# EAGLE board 13898-Qwiic_Accelerometer-MMA8452Q-panel.v10 (EAGLE 7.5.0), part 1 of 4
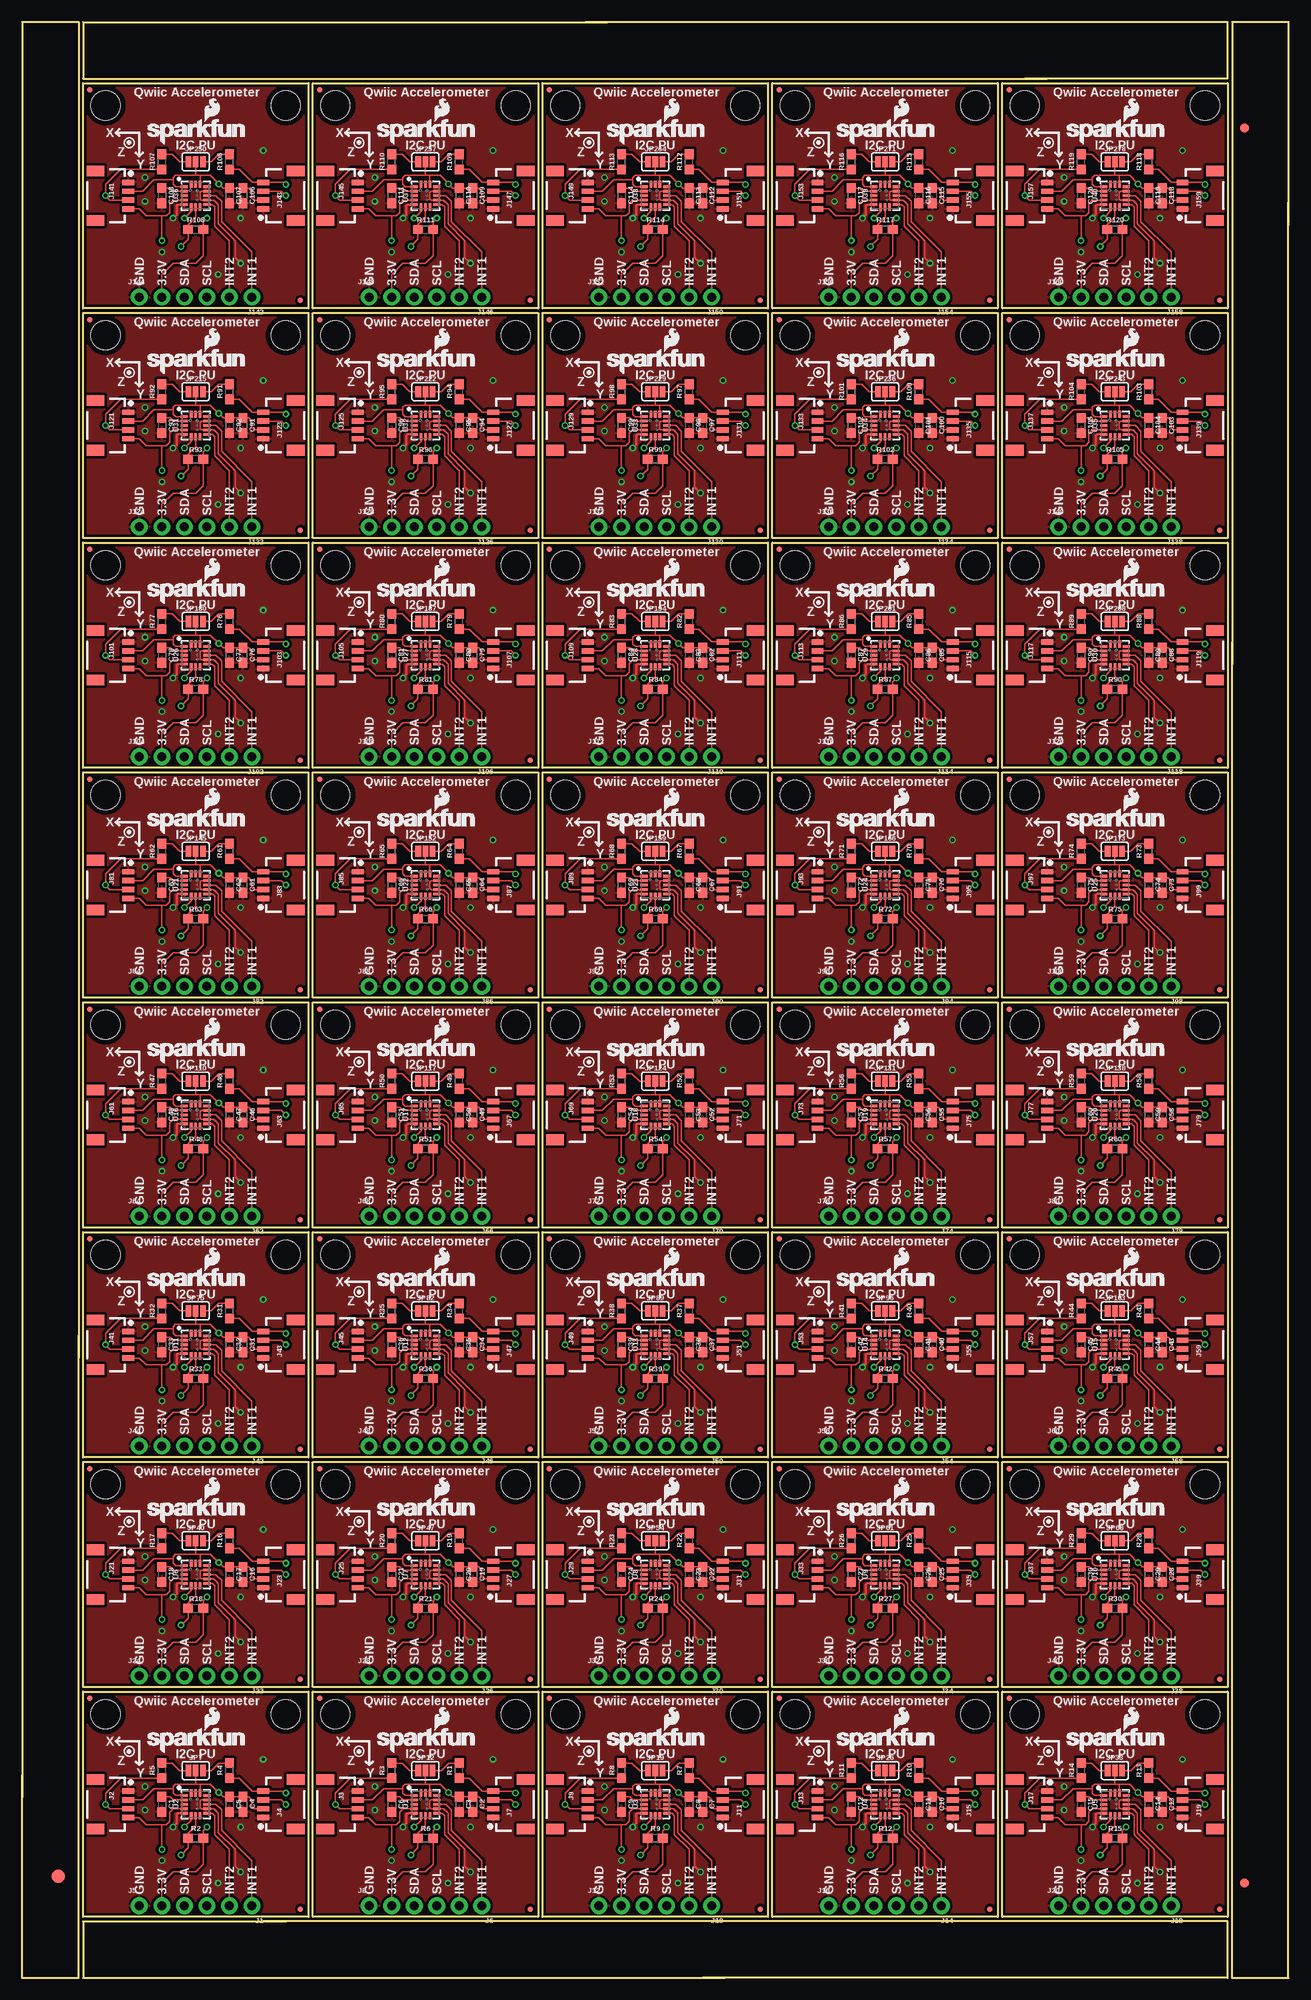
[diagram p0: board, top side]
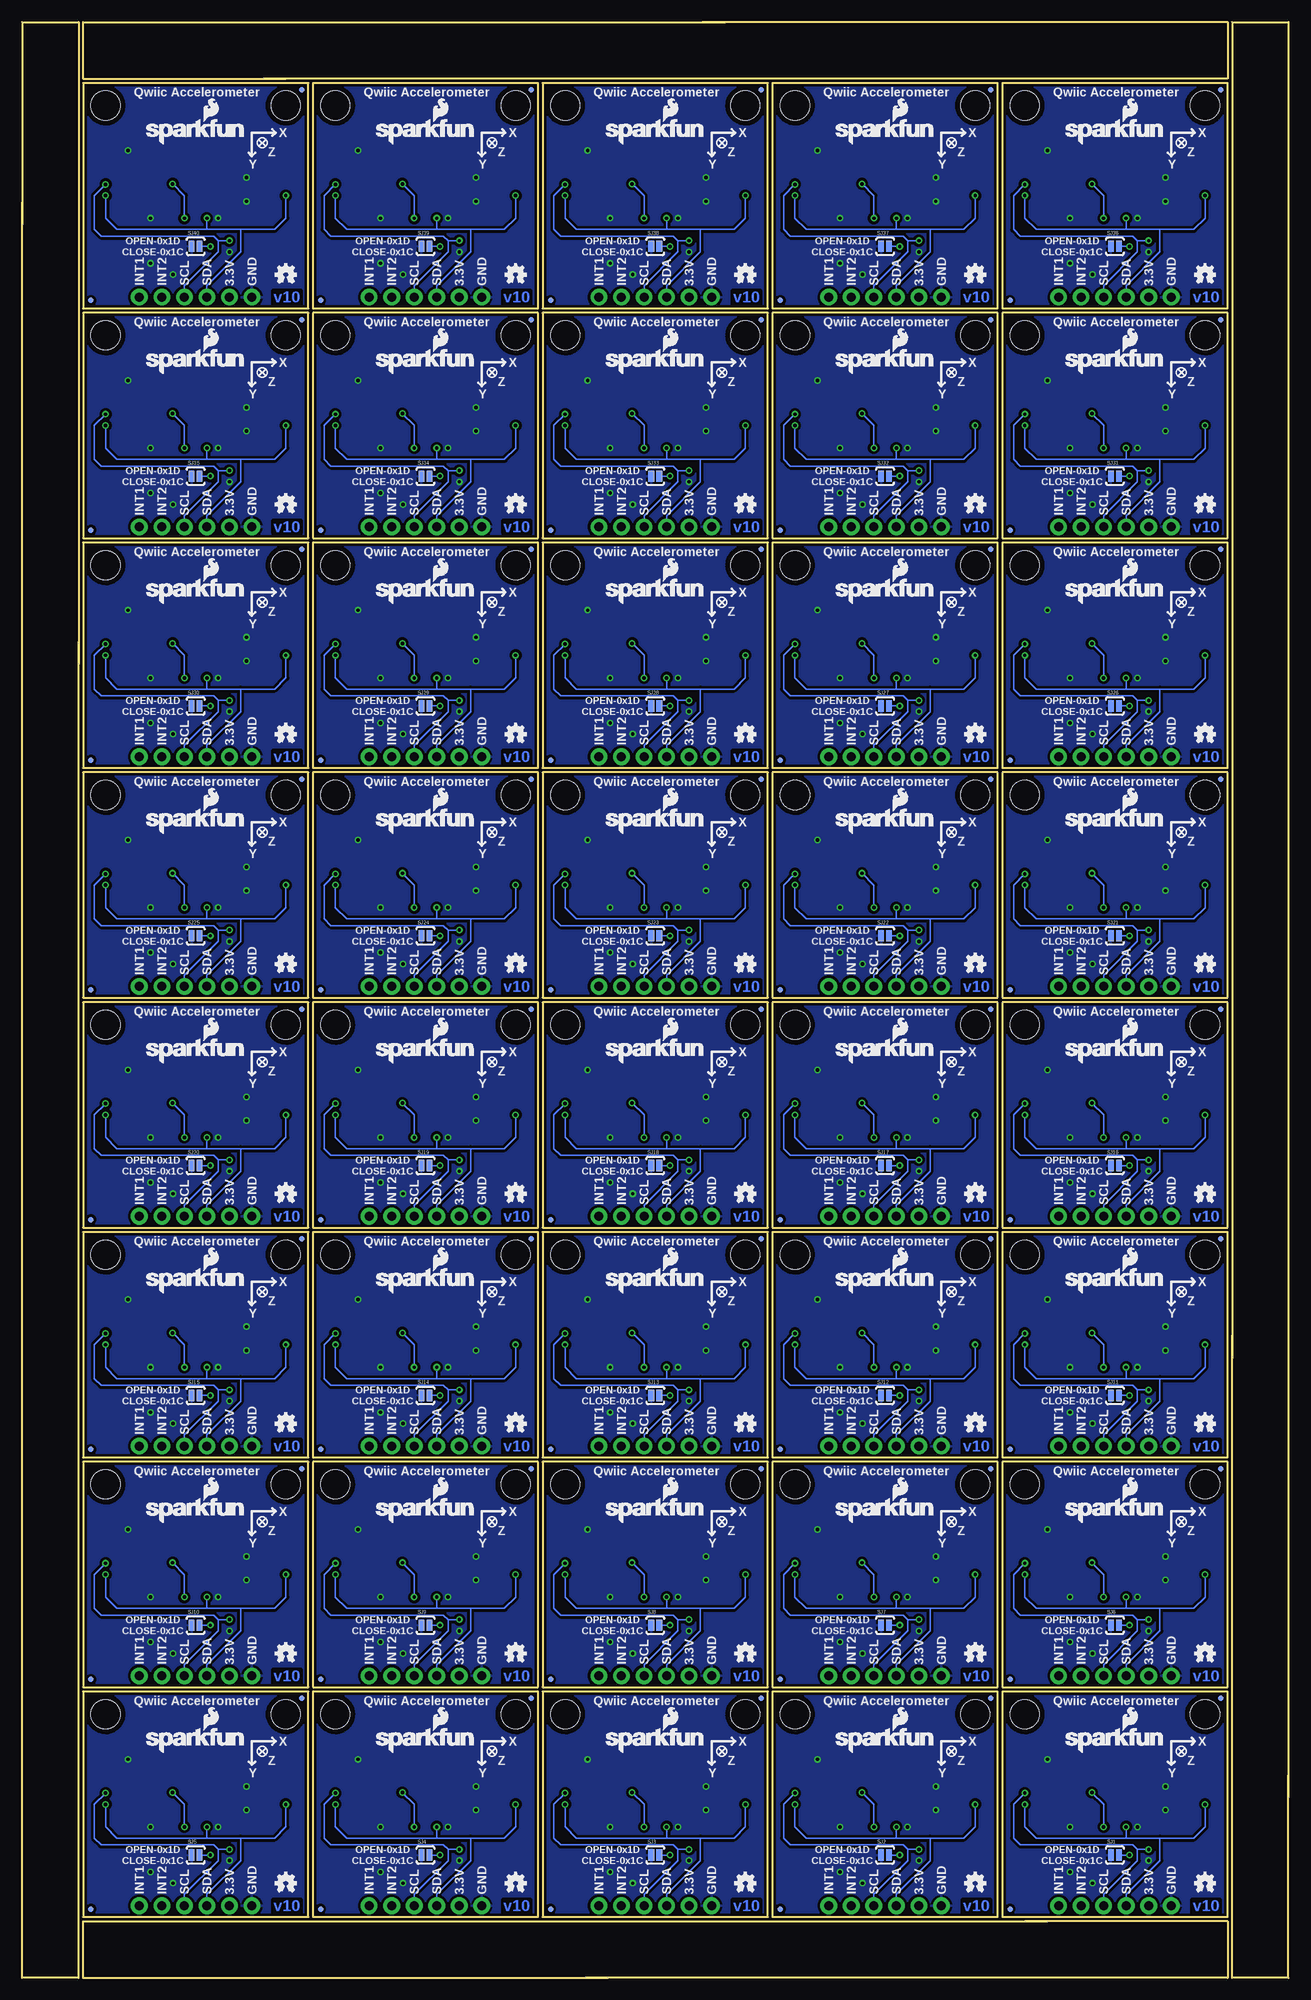
[diagram p1: board, bottom side, seen from below]

Size 142.75 x 220.47 mm. Coordinates in mm from the lower left corner, seen from the top.
Outline: 184 segments
Copper layers (1*16): Top 0.035mm / dielectric 1.5mm / Bottom 0.035mm
Design rules "SparkFun-2-layer-TIGHT": minimum track width 7mil, minimum drill 15mil, track to track 7mil, track to pad 7mil, pad to pad 7mil, via to via 7mil, smd to smd 7mil, copper to edge 7mil, drill to drill 7mil, minimum pad ring 7mil, minimum via ring 7mil, stop-mask expansion 4mil, vias tented up to drill 25mil, thermal gap 10mil

## Footprints (pad centres in the part's own frame; a part is rotated, then mirrored left to right if it is on the bottom)
0603 = smd 1.1 x 1: 1 -0.85,0; 2 0.85,0
FIDUCIAL-1.5X3 = smd 1.5 x 1.5: 1 0,0
FIDUCIAL-1X2 = smd 1 x 1: 1 0,0
1X02_NO_SILK = drill 1.016 pad 1.88: 1 0,0; 2 2.54,0
1X04_1MM_RA = smd 0.6 x 1.35: 1 -1.5,0; 2 -0.5,0; 3 0.5,0; 4 1.5,0 | smd 1.2 x 2: NC1 2.8,-3.675; NC2 -2.8,-3.675
1X04_NO_SILK = drill 1.016 pad 1.88: 1 0,0; 2 2.54,0; 3 5.08,0; 4 7.62,0
MICRO-FIDUCIAL = smd 0.635 x 0.635: 1 0,0
STAND-OFF = hole 3.302: 0,0
SMT-JUMPER_3_2-NC_PASTE_SILK = smd 0.635 x 1.27: 1 -0.813,0; 2 0,0; 3 0.813,0
SJ_2S-NO = smd 0.635 x 1.27: 1 -0.45,0; 2 0.45,0
QFN-16 = smd 0.8 x 0.3: 1 -1.275,1; 2 -1.275,0.5; 3 -1.275,0; 4 -1.275,-0.5; 5 -1.275,-1; 9 1.275,-1; 10 1.275,-0.5; 11 1.275,0; 12 1.275,0.5; 13 1.275,1 | smd 0.3 x 0.8: 6 -0.5,-1.275; 7 0,-1.275; 8 0.5,-1.275; 14 0.5,1.275; 15 0,1.275; 16 -0.5,1.275

## Placement (x,y rotation side)
C1  0.1uF  [0603]  15.75,19.56 270 top
C2  0.1uF  [0603]  50.8,19.56 270 top
C3  4.7uF  [0603]  49.28,19.56 270 top
C4  0.1uF  [0603]  24.89,19.56 270 top
C5  4.7uF  [0603]  23.37,19.56 270 top
C6  0.1uF  [0603]  41.66,19.56 270 top
C7  0.1uF  [0603]  76.71,19.56 270 top
C8  4.7uF  [0603]  75.18,19.56 270 top
C9  0.1uF  [0603]  67.56,19.56 270 top
C10  0.1uF  [0603]  102.62,19.56 270 top
C11  4.7uF  [0603]  101.09,19.56 270 top
C12  0.1uF  [0603]  93.47,19.56 270 top
C13  0.1uF  [0603]  128.52,19.56 270 top
C14  4.7uF  [0603]  127,19.56 270 top
C15  0.1uF  [0603]  119.38,19.56 270 top
C16  0.1uF  [0603]  24.89,45.47 270 top
C17  4.7uF  [0603]  23.37,45.47 270 top
C18  0.1uF  [0603]  15.75,45.47 270 top
C19  0.1uF  [0603]  50.8,45.47 270 top
C20  4.7uF  [0603]  49.28,45.47 270 top
C21  0.1uF  [0603]  41.66,45.47 270 top
C22  0.1uF  [0603]  76.71,45.47 270 top
C23  4.7uF  [0603]  75.18,45.47 270 top
C24  0.1uF  [0603]  67.56,45.47 270 top
C25  0.1uF  [0603]  102.62,45.47 270 top
C26  4.7uF  [0603]  101.09,45.47 270 top
C27  0.1uF  [0603]  93.47,45.47 270 top
C28  0.1uF  [0603]  128.52,45.47 270 top
C29  4.7uF  [0603]  127,45.47 270 top
C30  0.1uF  [0603]  119.38,45.47 270 top
C31  0.1uF  [0603]  24.89,71.37 270 top
C32  4.7uF  [0603]  23.37,71.37 270 top
C33  0.1uF  [0603]  15.75,71.37 270 top
C34  0.1uF  [0603]  50.8,71.37 270 top
C35  4.7uF  [0603]  49.28,71.37 270 top
C36  0.1uF  [0603]  41.66,71.37 270 top
C37  0.1uF  [0603]  76.71,71.37 270 top
C38  4.7uF  [0603]  75.18,71.37 270 top
C39  0.1uF  [0603]  67.56,71.37 270 top
C40  0.1uF  [0603]  102.62,71.37 270 top
C41  4.7uF  [0603]  101.09,71.37 270 top
C42  0.1uF  [0603]  93.47,71.37 270 top
C43  0.1uF  [0603]  128.52,71.37 270 top
C44  4.7uF  [0603]  127,71.37 270 top
C45  0.1uF  [0603]  119.38,71.37 270 top
C46  0.1uF  [0603]  24.89,97.28 270 top
C47  4.7uF  [0603]  23.37,97.28 270 top
C48  0.1uF  [0603]  15.75,97.28 270 top
C49  0.1uF  [0603]  50.8,97.28 270 top
C50  4.7uF  [0603]  49.28,97.28 270 top
C51  0.1uF  [0603]  41.66,97.28 270 top
C52  0.1uF  [0603]  76.71,97.28 270 top
C53  4.7uF  [0603]  75.18,97.28 270 top
C54  0.1uF  [0603]  67.56,97.28 270 top
C55  0.1uF  [0603]  102.62,97.28 270 top
C56  4.7uF  [0603]  101.09,97.28 270 top
C57  0.1uF  [0603]  93.47,97.28 270 top
C58  0.1uF  [0603]  128.52,97.28 270 top
C59  4.7uF  [0603]  127,97.28 270 top
C60  0.1uF  [0603]  119.38,97.28 270 top
C61  0.1uF  [0603]  24.89,123.19 270 top
C62  4.7uF  [0603]  23.37,123.19 270 top
C63  0.1uF  [0603]  15.75,123.19 270 top
C64  0.1uF  [0603]  50.8,123.19 270 top
C65  4.7uF  [0603]  49.28,123.19 270 top
C66  0.1uF  [0603]  41.66,123.19 270 top
C67  0.1uF  [0603]  76.71,123.19 270 top
C68  4.7uF  [0603]  75.18,123.19 270 top
C69  0.1uF  [0603]  67.56,123.19 270 top
C70  0.1uF  [0603]  102.62,123.19 270 top
C71  4.7uF  [0603]  101.09,123.19 270 top
C72  0.1uF  [0603]  93.47,123.19 270 top
C73  0.1uF  [0603]  128.52,123.19 270 top
C74  4.7uF  [0603]  127,123.19 270 top
C75  0.1uF  [0603]  119.38,123.19 270 top
C76  0.1uF  [0603]  24.89,149.1 270 top
C77  4.7uF  [0603]  23.37,149.1 270 top
C78  0.1uF  [0603]  15.75,149.1 270 top
C79  0.1uF  [0603]  50.8,149.1 270 top
C80  4.7uF  [0603]  49.28,149.1 270 top
C81  0.1uF  [0603]  41.66,149.1 270 top
C82  0.1uF  [0603]  76.71,149.1 270 top
C83  4.7uF  [0603]  75.18,149.1 270 top
C84  0.1uF  [0603]  67.56,149.1 270 top
C85  0.1uF  [0603]  102.62,149.1 270 top
C86  4.7uF  [0603]  101.09,149.1 270 top
C87  0.1uF  [0603]  93.47,149.1 270 top
C88  0.1uF  [0603]  128.52,149.1 270 top
C89  4.7uF  [0603]  127,149.1 270 top
C90  0.1uF  [0603]  119.38,149.1 270 top
C91  0.1uF  [0603]  24.89,175.01 270 top
C92  4.7uF  [0603]  23.37,175.01 270 top
C93  0.1uF  [0603]  15.75,175.01 270 top
C94  0.1uF  [0603]  50.8,175.01 270 top
C95  4.7uF  [0603]  49.28,175.01 270 top
C96  0.1uF  [0603]  41.66,175.01 270 top
C97  0.1uF  [0603]  76.71,175.01 270 top
C98  4.7uF  [0603]  75.18,175.01 270 top
C99  0.1uF  [0603]  67.56,175.01 270 top
C100  0.1uF  [0603]  102.62,175.01 270 top
C101  4.7uF  [0603]  101.09,175.01 270 top
C102  0.1uF  [0603]  93.47,175.01 270 top
C103  0.1uF  [0603]  128.52,175.01 270 top
C104  4.7uF  [0603]  127,175.01 270 top
C105  0.1uF  [0603]  119.38,175.01 270 top
C106  0.1uF  [0603]  24.89,200.91 270 top
C107  4.7uF  [0603]  23.37,200.91 270 top
C108  0.1uF  [0603]  15.75,200.91 270 top
C109  0.1uF  [0603]  50.8,200.91 270 top
C110  4.7uF  [0603]  49.28,200.91 270 top
C111  0.1uF  [0603]  41.66,200.91 270 top
C112  0.1uF  [0603]  76.71,200.91 270 top
C113  4.7uF  [0603]  75.18,200.91 270 top
C114  0.1uF  [0603]  67.56,200.91 270 top
C115  0.1uF  [0603]  102.62,200.91 270 top
C116  4.7uF  [0603]  101.09,200.91 270 top
C117  0.1uF  [0603]  93.47,200.91 270 top
C118  0.1uF  [0603]  128.52,200.91 270 top
C119  4.7uF  [0603]  127,200.91 270 top
C120  0.1uF  [0603]  119.38,200.91 270 top
E$1  [FIDUCIAL-1.5X3]  4.06,11.43 0 top
E$7  [FIDUCIAL-1X2]  137.79,208.53 180 top
E$8  [FIDUCIAL-1X2]  137.79,10.67 0 top
J1  [1X02_NO_SILK]  25.91,8.13 180 top
J2  [1X04_1MM_RA]  11.94,19.56 270 top
J3  [1X04_1MM_RA]  37.85,19.56 270 top
J4  [1X04_1MM_RA]  27.18,19.56 90 top
J5  [1X04_NO_SILK]  13.21,8.13 0 top
J6  [1X02_NO_SILK]  51.82,8.13 180 top
J7  [1X04_1MM_RA]  53.09,19.56 90 top
J8  [1X04_NO_SILK]  39.12,8.13 0 top
J9  [1X04_1MM_RA]  63.75,19.56 270 top
J10  [1X02_NO_SILK]  77.72,8.13 180 top
J11  [1X04_1MM_RA]  78.99,19.56 90 top
J12  [1X04_NO_SILK]  65.02,8.13 0 top
J13  [1X04_1MM_RA]  89.66,19.56 270 top
J14  [1X02_NO_SILK]  103.63,8.13 180 top
J15  [1X04_1MM_RA]  104.9,19.56 90 top
J16  [1X04_NO_SILK]  90.93,8.13 0 top
J17  [1X04_1MM_RA]  115.57,19.56 270 top
J18  [1X02_NO_SILK]  129.54,8.13 180 top
J19  [1X04_1MM_RA]  130.81,19.56 90 top
J20  [1X04_NO_SILK]  116.84,8.13 0 top
J21  [1X04_1MM_RA]  11.94,45.47 270 top
J22  [1X02_NO_SILK]  25.91,34.04 180 top
J23  [1X04_1MM_RA]  27.18,45.47 90 top
J24  [1X04_NO_SILK]  13.21,34.04 0 top
J25  [1X04_1MM_RA]  37.85,45.47 270 top
J26  [1X02_NO_SILK]  51.82,34.04 180 top
J27  [1X04_1MM_RA]  53.09,45.47 90 top
J28  [1X04_NO_SILK]  39.12,34.04 0 top
J29  [1X04_1MM_RA]  63.75,45.47 270 top
J30  [1X02_NO_SILK]  77.72,34.04 180 top
J31  [1X04_1MM_RA]  78.99,45.47 90 top
J32  [1X04_NO_SILK]  65.02,34.04 0 top
J33  [1X04_1MM_RA]  89.66,45.47 270 top
J34  [1X02_NO_SILK]  103.63,34.04 180 top
J35  [1X04_1MM_RA]  104.9,45.47 90 top
J36  [1X04_NO_SILK]  90.93,34.04 0 top
J37  [1X04_1MM_RA]  115.57,45.47 270 top
J38  [1X02_NO_SILK]  129.54,34.04 180 top
J39  [1X04_1MM_RA]  130.81,45.47 90 top
J40  [1X04_NO_SILK]  116.84,34.04 0 top
J41  [1X04_1MM_RA]  11.94,71.37 270 top
J42  [1X02_NO_SILK]  25.91,59.94 180 top
J43  [1X04_1MM_RA]  27.18,71.37 90 top
J44  [1X04_NO_SILK]  13.21,59.94 0 top
J45  [1X04_1MM_RA]  37.85,71.37 270 top
J46  [1X02_NO_SILK]  51.82,59.94 180 top
J47  [1X04_1MM_RA]  53.09,71.37 90 top
J48  [1X04_NO_SILK]  39.12,59.94 0 top
J49  [1X04_1MM_RA]  63.75,71.37 270 top
J50  [1X02_NO_SILK]  77.72,59.94 180 top
J51  [1X04_1MM_RA]  78.99,71.37 90 top
J52  [1X04_NO_SILK]  65.02,59.94 0 top
J53  [1X04_1MM_RA]  89.66,71.37 270 top
J54  [1X02_NO_SILK]  103.63,59.94 180 top
J55  [1X04_1MM_RA]  104.9,71.37 90 top
J56  [1X04_NO_SILK]  90.93,59.94 0 top
J57  [1X04_1MM_RA]  115.57,71.37 270 top
J58  [1X02_NO_SILK]  129.54,59.94 180 top
J59  [1X04_1MM_RA]  130.81,71.37 90 top
J60  [1X04_NO_SILK]  116.84,59.94 0 top
J61  [1X04_1MM_RA]  11.94,97.28 270 top
J62  [1X02_NO_SILK]  25.91,85.85 180 top
J63  [1X04_1MM_RA]  27.18,97.28 90 top
J64  [1X04_NO_SILK]  13.21,85.85 0 top
J65  [1X04_1MM_RA]  37.85,97.28 270 top
J66  [1X02_NO_SILK]  51.82,85.85 180 top
J67  [1X04_1MM_RA]  53.09,97.28 90 top
J68  [1X04_NO_SILK]  39.12,85.85 0 top
J69  [1X04_1MM_RA]  63.75,97.28 270 top
J70  [1X02_NO_SILK]  77.72,85.85 180 top
J71  [1X04_1MM_RA]  78.99,97.28 90 top
J72  [1X04_NO_SILK]  65.02,85.85 0 top
J73  [1X04_1MM_RA]  89.66,97.28 270 top
J74  [1X02_NO_SILK]  103.63,85.85 180 top
J75  [1X04_1MM_RA]  104.9,97.28 90 top
J76  [1X04_NO_SILK]  90.93,85.85 0 top
J77  [1X04_1MM_RA]  115.57,97.28 270 top
J78  [1X02_NO_SILK]  129.54,85.85 180 top
J79  [1X04_1MM_RA]  130.81,97.28 90 top
J80  [1X04_NO_SILK]  116.84,85.85 0 top
J81  [1X04_1MM_RA]  11.94,123.19 270 top
J82  [1X02_NO_SILK]  25.91,111.76 180 top
J83  [1X04_1MM_RA]  27.18,123.19 90 top
J84  [1X04_NO_SILK]  13.21,111.76 0 top
J85  [1X04_1MM_RA]  37.85,123.19 270 top
J86  [1X02_NO_SILK]  51.82,111.76 180 top
J87  [1X04_1MM_RA]  53.09,123.19 90 top
J88  [1X04_NO_SILK]  39.12,111.76 0 top
J89  [1X04_1MM_RA]  63.75,123.19 270 top
J90  [1X02_NO_SILK]  77.72,111.76 180 top
J91  [1X04_1MM_RA]  78.99,123.19 90 top
J92  [1X04_NO_SILK]  65.02,111.76 0 top
J93  [1X04_1MM_RA]  89.66,123.19 270 top
J94  [1X02_NO_SILK]  103.63,111.76 180 top
J95  [1X04_1MM_RA]  104.9,123.19 90 top
J96  [1X04_NO_SILK]  90.93,111.76 0 top
J97  [1X04_1MM_RA]  115.57,123.19 270 top
J98  [1X02_NO_SILK]  129.54,111.76 180 top
J99  [1X04_1MM_RA]  130.81,123.19 90 top
J100  [1X04_NO_SILK]  116.84,111.76 0 top
J101  [1X04_1MM_RA]  11.94,149.1 270 top
J102  [1X02_NO_SILK]  25.91,137.67 180 top
J103  [1X04_1MM_RA]  27.18,149.1 90 top
J104  [1X04_NO_SILK]  13.21,137.67 0 top
J105  [1X04_1MM_RA]  37.85,149.1 270 top
J106  [1X02_NO_SILK]  51.82,137.67 180 top
J107  [1X04_1MM_RA]  53.09,149.1 90 top
J108  [1X04_NO_SILK]  39.12,137.67 0 top
J109  [1X04_1MM_RA]  63.75,149.1 270 top
J110  [1X02_NO_SILK]  77.72,137.67 180 top
J111  [1X04_1MM_RA]  78.99,149.1 90 top
J112  [1X04_NO_SILK]  65.02,137.67 0 top
J113  [1X04_1MM_RA]  89.66,149.1 270 top
J114  [1X02_NO_SILK]  103.63,137.67 180 top
J115  [1X04_1MM_RA]  104.9,149.1 90 top
J116  [1X04_NO_SILK]  90.93,137.67 0 top
J117  [1X04_1MM_RA]  115.57,149.1 270 top
J118  [1X02_NO_SILK]  129.54,137.67 180 top
J119  [1X04_1MM_RA]  130.81,149.1 90 top
J120  [1X04_NO_SILK]  116.84,137.67 0 top
J121  [1X04_1MM_RA]  11.94,175.01 270 top
J122  [1X02_NO_SILK]  25.91,163.58 180 top
J123  [1X04_1MM_RA]  27.18,175.01 90 top
J124  [1X04_NO_SILK]  13.21,163.58 0 top
J125  [1X04_1MM_RA]  37.85,175.01 270 top
J126  [1X02_NO_SILK]  51.82,163.58 180 top
J127  [1X04_1MM_RA]  53.09,175.01 90 top
J128  [1X04_NO_SILK]  39.12,163.58 0 top
J129  [1X04_1MM_RA]  63.75,175.01 270 top
J130  [1X02_NO_SILK]  77.72,163.58 180 top
J131  [1X04_1MM_RA]  78.99,175.01 90 top
J132  [1X04_NO_SILK]  65.02,163.58 0 top
J133  [1X04_1MM_RA]  89.66,175.01 270 top
J134  [1X02_NO_SILK]  103.63,163.58 180 top
J135  [1X04_1MM_RA]  104.9,175.01 90 top
J136  [1X04_NO_SILK]  90.93,163.58 0 top
J137  [1X04_1MM_RA]  115.57,175.01 270 top
J138  [1X02_NO_SILK]  129.54,163.58 180 top
J139  [1X04_1MM_RA]  130.81,175.01 90 top
J140  [1X04_NO_SILK]  116.84,163.58 0 top
J141  [1X04_1MM_RA]  11.94,200.91 270 top
J142  [1X02_NO_SILK]  25.91,189.48 180 top
J143  [1X04_1MM_RA]  27.18,200.91 90 top
J144  [1X04_NO_SILK]  13.21,189.48 0 top
J145  [1X04_1MM_RA]  37.85,200.91 270 top
J146  [1X02_NO_SILK]  51.82,189.48 180 top
J147  [1X04_1MM_RA]  53.09,200.91 90 top
J148  [1X04_NO_SILK]  39.12,189.48 0 top
J149  [1X04_1MM_RA]  63.75,200.91 270 top
J150  [1X02_NO_SILK]  77.72,189.48 180 top
J151  [1X04_1MM_RA]  78.99,200.91 90 top
J152  [1X04_NO_SILK]  65.02,189.48 0 top
J153  [1X04_1MM_RA]  89.66,200.91 270 top
J154  [1X02_NO_SILK]  103.63,189.48 180 top
J155  [1X04_1MM_RA]  104.9,200.91 90 top
J156  [1X04_NO_SILK]  90.93,189.48 0 top
J157  [1X04_1MM_RA]  115.57,200.91 270 top
J158  [1X02_NO_SILK]  129.54,189.48 180 top
J159  [1X04_1MM_RA]  130.81,200.91 90 top
J160  [1X04_NO_SILK]  116.84,189.48 0 top
JP1  FIDUCIALUFIDUCIAL  [MICRO-FIDUCIAL]  31.37,7.75 0 bottom
JP2  FIDUCIALUFIDUCIAL  [MICRO-FIDUCIAL]  31.37,7.75 0 top
JP3  STAND-OFF  [STAND-OFF]  9.4,29.72 0 top
JP4  STAND-OFF  [STAND-OFF]  29.72,29.72 0 top
JP5  FIDUCIALUFIDUCIAL  [MICRO-FIDUCIAL]  7.62,31.5 0 bottom
JP6  FIDUCIALUFIDUCIAL  [MICRO-FIDUCIAL]  7.62,31.5 0 top
JP7  [SMT-JUMPER_3_2-NC_PASTE_SILK]  19.56,23.37 0 top
JP8  STAND-OFF  [STAND-OFF]  35.31,29.72 0 top
JP9  STAND-OFF  [STAND-OFF]  55.63,29.72 0 top
JP10  FIDUCIALUFIDUCIAL  [MICRO-FIDUCIAL]  57.28,7.75 0 top
JP11  FIDUCIALUFIDUCIAL  [MICRO-FIDUCIAL]  33.53,31.5 0 top
JP12  [SMT-JUMPER_3_2-NC_PASTE_SILK]  45.47,23.37 0 top
JP13  FIDUCIALUFIDUCIAL  [MICRO-FIDUCIAL]  57.28,7.75 0 bottom
JP14  FIDUCIALUFIDUCIAL  [MICRO-FIDUCIAL]  33.53,31.5 0 bottom
JP15  STAND-OFF  [STAND-OFF]  61.21,29.72 0 top
JP16  STAND-OFF  [STAND-OFF]  81.53,29.72 0 top
JP17  FIDUCIALUFIDUCIAL  [MICRO-FIDUCIAL]  83.19,7.75 0 top
JP18  FIDUCIALUFIDUCIAL  [MICRO-FIDUCIAL]  59.44,31.5 0 top
JP19  [SMT-JUMPER_3_2-NC_PASTE_SILK]  71.37,23.37 0 top
JP20  FIDUCIALUFIDUCIAL  [MICRO-FIDUCIAL]  83.19,7.75 0 bottom
JP21  FIDUCIALUFIDUCIAL  [MICRO-FIDUCIAL]  59.44,31.5 0 bottom
JP22  STAND-OFF  [STAND-OFF]  87.12,29.72 0 top
JP23  STAND-OFF  [STAND-OFF]  107.44,29.72 0 top
JP24  FIDUCIALUFIDUCIAL  [MICRO-FIDUCIAL]  109.09,7.75 0 top
JP25  FIDUCIALUFIDUCIAL  [MICRO-FIDUCIAL]  85.34,31.5 0 top
JP26  [SMT-JUMPER_3_2-NC_PASTE_SILK]  97.28,23.37 0 top
JP27  FIDUCIALUFIDUCIAL  [MICRO-FIDUCIAL]  109.09,7.75 0 bottom
JP28  FIDUCIALUFIDUCIAL  [MICRO-FIDUCIAL]  85.34,31.5 0 bottom
JP29  STAND-OFF  [STAND-OFF]  113.03,29.72 0 top
JP30  STAND-OFF  [STAND-OFF]  133.35,29.72 0 top
JP31  FIDUCIALUFIDUCIAL  [MICRO-FIDUCIAL]  135,7.75 0 top
JP32  FIDUCIALUFIDUCIAL  [MICRO-FIDUCIAL]  111.25,31.5 0 top
JP33  [SMT-JUMPER_3_2-NC_PASTE_SILK]  123.19,23.37 0 top
JP34  FIDUCIALUFIDUCIAL  [MICRO-FIDUCIAL]  135,7.75 0 bottom
JP35  FIDUCIALUFIDUCIAL  [MICRO-FIDUCIAL]  111.25,31.5 0 bottom
JP36  STAND-OFF  [STAND-OFF]  9.4,55.63 0 top
JP37  STAND-OFF  [STAND-OFF]  29.72,55.63 0 top
JP38  FIDUCIALUFIDUCIAL  [MICRO-FIDUCIAL]  31.37,33.66 0 top
JP39  FIDUCIALUFIDUCIAL  [MICRO-FIDUCIAL]  7.62,57.4 0 top
JP40  [SMT-JUMPER_3_2-NC_PASTE_SILK]  19.56,49.28 0 top
JP41  FIDUCIALUFIDUCIAL  [MICRO-FIDUCIAL]  31.37,33.66 0 bottom
JP42  FIDUCIALUFIDUCIAL  [MICRO-FIDUCIAL]  7.62,57.4 0 bottom
JP43  STAND-OFF  [STAND-OFF]  35.31,55.63 0 top
JP44  STAND-OFF  [STAND-OFF]  55.63,55.63 0 top
JP45  FIDUCIALUFIDUCIAL  [MICRO-FIDUCIAL]  57.28,33.66 0 top
JP46  FIDUCIALUFIDUCIAL  [MICRO-FIDUCIAL]  33.53,57.4 0 top
JP47  [SMT-JUMPER_3_2-NC_PASTE_SILK]  45.47,49.28 0 top
JP48  FIDUCIALUFIDUCIAL  [MICRO-FIDUCIAL]  57.28,33.66 0 bottom
JP49  FIDUCIALUFIDUCIAL  [MICRO-FIDUCIAL]  33.53,57.4 0 bottom
JP50  STAND-OFF  [STAND-OFF]  61.21,55.63 0 top
JP51  STAND-OFF  [STAND-OFF]  81.53,55.63 0 top
JP52  FIDUCIALUFIDUCIAL  [MICRO-FIDUCIAL]  83.19,33.66 0 top
JP53  FIDUCIALUFIDUCIAL  [MICRO-FIDUCIAL]  59.44,57.4 0 top
JP54  [SMT-JUMPER_3_2-NC_PASTE_SILK]  71.37,49.28 0 top
JP55  FIDUCIALUFIDUCIAL  [MICRO-FIDUCIAL]  83.19,33.66 0 bottom
JP56  FIDUCIALUFIDUCIAL  [MICRO-FIDUCIAL]  59.44,57.4 0 bottom
JP57  STAND-OFF  [STAND-OFF]  87.12,55.63 0 top
JP58  STAND-OFF  [STAND-OFF]  107.44,55.63 0 top
JP59  FIDUCIALUFIDUCIAL  [MICRO-FIDUCIAL]  109.09,33.66 0 top
JP60  FIDUCIALUFIDUCIAL  [MICRO-FIDUCIAL]  85.34,57.4 0 top
JP61  [SMT-JUMPER_3_2-NC_PASTE_SILK]  97.28,49.28 0 top
JP62  FIDUCIALUFIDUCIAL  [MICRO-FIDUCIAL]  109.09,33.66 0 bottom
JP63  FIDUCIALUFIDUCIAL  [MICRO-FIDUCIAL]  85.34,57.4 0 bottom
JP64  STAND-OFF  [STAND-OFF]  113.03,55.63 0 top
JP65  STAND-OFF  [STAND-OFF]  133.35,55.63 0 top
JP66  FIDUCIALUFIDUCIAL  [MICRO-FIDUCIAL]  135,33.66 0 top
JP67  FIDUCIALUFIDUCIAL  [MICRO-FIDUCIAL]  111.25,57.4 0 top
JP68  [SMT-JUMPER_3_2-NC_PASTE_SILK]  123.19,49.28 0 top
JP69  FIDUCIALUFIDUCIAL  [MICRO-FIDUCIAL]  135,33.66 0 bottom
JP70  FIDUCIALUFIDUCIAL  [MICRO-FIDUCIAL]  111.25,57.4 0 bottom
JP71  STAND-OFF  [STAND-OFF]  9.4,81.53 0 top
JP72  STAND-OFF  [STAND-OFF]  29.72,81.53 0 top
JP73  FIDUCIALUFIDUCIAL  [MICRO-FIDUCIAL]  31.37,59.56 0 top
JP74  FIDUCIALUFIDUCIAL  [MICRO-FIDUCIAL]  7.62,83.31 0 top
JP75  [SMT-JUMPER_3_2-NC_PASTE_SILK]  19.56,75.18 0 top
JP76  FIDUCIALUFIDUCIAL  [MICRO-FIDUCIAL]  31.37,59.56 0 bottom
JP77  FIDUCIALUFIDUCIAL  [MICRO-FIDUCIAL]  7.62,83.31 0 bottom
JP78  STAND-OFF  [STAND-OFF]  35.31,81.53 0 top
JP79  STAND-OFF  [STAND-OFF]  55.63,81.53 0 top
JP80  FIDUCIALUFIDUCIAL  [MICRO-FIDUCIAL]  57.28,59.56 0 top
JP81  FIDUCIALUFIDUCIAL  [MICRO-FIDUCIAL]  33.53,83.31 0 top
JP82  [SMT-JUMPER_3_2-NC_PASTE_SILK]  45.47,75.18 0 top
JP83  FIDUCIALUFIDUCIAL  [MICRO-FIDUCIAL]  57.28,59.56 0 bottom
JP84  FIDUCIALUFIDUCIAL  [MICRO-FIDUCIAL]  33.53,83.31 0 bottom
JP85  STAND-OFF  [STAND-OFF]  61.21,81.53 0 top
JP86  STAND-OFF  [STAND-OFF]  81.53,81.53 0 top
JP87  FIDUCIALUFIDUCIAL  [MICRO-FIDUCIAL]  83.19,59.56 0 top
JP88  FIDUCIALUFIDUCIAL  [MICRO-FIDUCIAL]  59.44,83.31 0 top
JP89  [SMT-JUMPER_3_2-NC_PASTE_SILK]  71.37,75.18 0 top
JP90  FIDUCIALUFIDUCIAL  [MICRO-FIDUCIAL]  83.19,59.56 0 bottom
JP91  FIDUCIALUFIDUCIAL  [MICRO-FIDUCIAL]  59.44,83.31 0 bottom
JP92  STAND-OFF  [STAND-OFF]  87.12,81.53 0 top
JP93  STAND-OFF  [STAND-OFF]  107.44,81.53 0 top
JP94  FIDUCIALUFIDUCIAL  [MICRO-FIDUCIAL]  109.09,59.56 0 top
JP95  FIDUCIALUFIDUCIAL  [MICRO-FIDUCIAL]  85.34,83.31 0 top
JP96  [SMT-JUMPER_3_2-NC_PASTE_SILK]  97.28,75.18 0 top
JP97  FIDUCIALUFIDUCIAL  [MICRO-FIDUCIAL]  109.09,59.56 0 bottom
JP98  FIDUCIALUFIDUCIAL  [MICRO-FIDUCIAL]  85.34,83.31 0 bottom
JP99  STAND-OFF  [STAND-OFF]  113.03,81.53 0 top
JP100  STAND-OFF  [STAND-OFF]  133.35,81.53 0 top
JP101  FIDUCIALUFIDUCIAL  [MICRO-FIDUCIAL]  135,59.56 0 top
JP102  FIDUCIALUFIDUCIAL  [MICRO-FIDUCIAL]  111.25,83.31 0 top
JP103  [SMT-JUMPER_3_2-NC_PASTE_SILK]  123.19,75.18 0 top
JP104  FIDUCIALUFIDUCIAL  [MICRO-FIDUCIAL]  135,59.56 0 bottom
JP105  FIDUCIALUFIDUCIAL  [MICRO-FIDUCIAL]  111.25,83.31 0 bottom
JP106  STAND-OFF  [STAND-OFF]  9.4,107.44 0 top
JP107  STAND-OFF  [STAND-OFF]  29.72,107.44 0 top
JP108  FIDUCIALUFIDUCIAL  [MICRO-FIDUCIAL]  31.37,85.47 0 top
JP109  FIDUCIALUFIDUCIAL  [MICRO-FIDUCIAL]  7.62,109.22 0 top
JP110  [SMT-JUMPER_3_2-NC_PASTE_SILK]  19.56,101.09 0 top
JP111  FIDUCIALUFIDUCIAL  [MICRO-FIDUCIAL]  31.37,85.47 0 bottom
JP112  FIDUCIALUFIDUCIAL  [MICRO-FIDUCIAL]  7.62,109.22 0 bottom
JP113  STAND-OFF  [STAND-OFF]  35.31,107.44 0 top
JP114  STAND-OFF  [STAND-OFF]  55.63,107.44 0 top
JP115  FIDUCIALUFIDUCIAL  [MICRO-FIDUCIAL]  57.28,85.47 0 top
JP116  FIDUCIALUFIDUCIAL  [MICRO-FIDUCIAL]  33.53,109.22 0 top
JP117  [SMT-JUMPER_3_2-NC_PASTE_SILK]  45.47,101.09 0 top
JP118  FIDUCIALUFIDUCIAL  [MICRO-FIDUCIAL]  57.28,85.47 0 bottom
JP119  FIDUCIALUFIDUCIAL  [MICRO-FIDUCIAL]  33.53,109.22 0 bottom
JP120  STAND-OFF  [STAND-OFF]  61.21,107.44 0 top
JP121  STAND-OFF  [STAND-OFF]  81.53,107.44 0 top
JP122  FIDUCIALUFIDUCIAL  [MICRO-FIDUCIAL]  83.19,85.47 0 top
JP123  FIDUCIALUFIDUCIAL  [MICRO-FIDUCIAL]  59.44,109.22 0 top
JP124  [SMT-JUMPER_3_2-NC_PASTE_SILK]  71.37,101.09 0 top
JP125  FIDUCIALUFIDUCIAL  [MICRO-FIDUCIAL]  83.19,85.47 0 bottom
JP126  FIDUCIALUFIDUCIAL  [MICRO-FIDUCIAL]  59.44,109.22 0 bottom
JP127  STAND-OFF  [STAND-OFF]  87.12,107.44 0 top
JP128  STAND-OFF  [STAND-OFF]  107.44,107.44 0 top
JP129  FIDUCIALUFIDUCIAL  [MICRO-FIDUCIAL]  109.09,85.47 0 top
JP130  FIDUCIALUFIDUCIAL  [MICRO-FIDUCIAL]  85.34,109.22 0 top
JP131  [SMT-JUMPER_3_2-NC_PASTE_SILK]  97.28,101.09 0 top
JP132  FIDUCIALUFIDUCIAL  [MICRO-FIDUCIAL]  109.09,85.47 0 bottom
JP133  FIDUCIALUFIDUCIAL  [MICRO-FIDUCIAL]  85.34,109.22 0 bottom
JP134  STAND-OFF  [STAND-OFF]  113.03,107.44 0 top
JP135  STAND-OFF  [STAND-OFF]  133.35,107.44 0 top
JP136  FIDUCIALUFIDUCIAL  [MICRO-FIDUCIAL]  135,85.47 0 top
JP137  FIDUCIALUFIDUCIAL  [MICRO-FIDUCIAL]  111.25,109.22 0 top
JP138  [SMT-JUMPER_3_2-NC_PASTE_SILK]  123.19,101.09 0 top
JP139  FIDUCIALUFIDUCIAL  [MICRO-FIDUCIAL]  135,85.47 0 bottom
JP140  FIDUCIALUFIDUCIAL  [MICRO-FIDUCIAL]  111.25,109.22 0 bottom
JP141  STAND-OFF  [STAND-OFF]  9.4,133.35 0 top
JP142  STAND-OFF  [STAND-OFF]  29.72,133.35 0 top
JP143  FIDUCIALUFIDUCIAL  [MICRO-FIDUCIAL]  31.37,111.38 0 top
JP144  FIDUCIALUFIDUCIAL  [MICRO-FIDUCIAL]  7.62,135.13 0 top
JP145  [SMT-JUMPER_3_2-NC_PASTE_SILK]  19.56,127 0 top
JP146  FIDUCIALUFIDUCIAL  [MICRO-FIDUCIAL]  31.37,111.38 0 bottom
JP147  FIDUCIALUFIDUCIAL  [MICRO-FIDUCIAL]  7.62,135.13 0 bottom
JP148  STAND-OFF  [STAND-OFF]  35.31,133.35 0 top
JP149  STAND-OFF  [STAND-OFF]  55.63,133.35 0 top
JP150  FIDUCIALUFIDUCIAL  [MICRO-FIDUCIAL]  57.28,111.38 0 top
JP151  FIDUCIALUFIDUCIAL  [MICRO-FIDUCIAL]  33.53,135.13 0 top
JP152  [SMT-JUMPER_3_2-NC_PASTE_SILK]  45.47,127 0 top
JP153  FIDUCIALUFIDUCIAL  [MICRO-FIDUCIAL]  57.28,111.38 0 bottom
JP154  FIDUCIALUFIDUCIAL  [MICRO-FIDUCIAL]  33.53,135.13 0 bottom
JP155  STAND-OFF  [STAND-OFF]  61.21,133.35 0 top
JP156  STAND-OFF  [STAND-OFF]  81.53,133.35 0 top
JP157  FIDUCIALUFIDUCIAL  [MICRO-FIDUCIAL]  83.19,111.38 0 top
JP158  FIDUCIALUFIDUCIAL  [MICRO-FIDUCIAL]  59.44,135.13 0 top
JP159  [SMT-JUMPER_3_2-NC_PASTE_SILK]  71.37,127 0 top
JP160  FIDUCIALUFIDUCIAL  [MICRO-FIDUCIAL]  83.19,111.38 0 bottom
JP161  FIDUCIALUFIDUCIAL  [MICRO-FIDUCIAL]  59.44,135.13 0 bottom
JP162  STAND-OFF  [STAND-OFF]  87.12,133.35 0 top
JP163  STAND-OFF  [STAND-OFF]  107.44,133.35 0 top
JP164  FIDUCIALUFIDUCIAL  [MICRO-FIDUCIAL]  109.09,111.38 0 top
JP165  FIDUCIALUFIDUCIAL  [MICRO-FIDUCIAL]  85.34,135.13 0 top
JP166  [SMT-JUMPER_3_2-NC_PASTE_SILK]  97.28,127 0 top
JP167  FIDUCIALUFIDUCIAL  [MICRO-FIDUCIAL]  109.09,111.38 0 bottom
JP168  FIDUCIALUFIDUCIAL  [MICRO-FIDUCIAL]  85.34,135.13 0 bottom
JP169  STAND-OFF  [STAND-OFF]  113.03,133.35 0 top
JP170  STAND-OFF  [STAND-OFF]  133.35,133.35 0 top
JP171  FIDUCIALUFIDUCIAL  [MICRO-FIDUCIAL]  135,111.38 0 top
JP172  FIDUCIALUFIDUCIAL  [MICRO-FIDUCIAL]  111.25,135.13 0 top
JP173  [SMT-JUMPER_3_2-NC_PASTE_SILK]  123.19,127 0 top
JP174  FIDUCIALUFIDUCIAL  [MICRO-FIDUCIAL]  135,111.38 0 bottom
JP175  FIDUCIALUFIDUCIAL  [MICRO-FIDUCIAL]  111.25,135.13 0 bottom
JP176  STAND-OFF  [STAND-OFF]  9.4,159.26 0 top
JP177  STAND-OFF  [STAND-OFF]  29.72,159.26 0 top
JP178  FIDUCIALUFIDUCIAL  [MICRO-FIDUCIAL]  31.37,137.29 0 top
JP179  FIDUCIALUFIDUCIAL  [MICRO-FIDUCIAL]  7.62,161.04 0 top
JP180  [SMT-JUMPER_3_2-NC_PASTE_SILK]  19.56,152.91 0 top
JP181  FIDUCIALUFIDUCIAL  [MICRO-FIDUCIAL]  31.37,137.29 0 bottom
JP182  FIDUCIALUFIDUCIAL  [MICRO-FIDUCIAL]  7.62,161.04 0 bottom
JP183  STAND-OFF  [STAND-OFF]  35.31,159.26 0 top
JP184  STAND-OFF  [STAND-OFF]  55.63,159.26 0 top
JP185  FIDUCIALUFIDUCIAL  [MICRO-FIDUCIAL]  57.28,137.29 0 top
JP186  FIDUCIALUFIDUCIAL  [MICRO-FIDUCIAL]  33.53,161.04 0 top
JP187  [SMT-JUMPER_3_2-NC_PASTE_SILK]  45.47,152.91 0 top
JP188  FIDUCIALUFIDUCIAL  [MICRO-FIDUCIAL]  57.28,137.29 0 bottom
JP189  FIDUCIALUFIDUCIAL  [MICRO-FIDUCIAL]  33.53,161.04 0 bottom
JP190  STAND-OFF  [STAND-OFF]  61.21,159.26 0 top
JP191  STAND-OFF  [STAND-OFF]  81.53,159.26 0 top
JP192  FIDUCIALUFIDUCIAL  [MICRO-FIDUCIAL]  83.19,137.29 0 top
JP193  FIDUCIALUFIDUCIAL  [MICRO-FIDUCIAL]  59.44,161.04 0 top
JP194  [SMT-JUMPER_3_2-NC_PASTE_SILK]  71.37,152.91 0 top
JP195  FIDUCIALUFIDUCIAL  [MICRO-FIDUCIAL]  83.19,137.29 0 bottom
JP196  FIDUCIALUFIDUCIAL  [MICRO-FIDUCIAL]  59.44,161.04 0 bottom
JP197  STAND-OFF  [STAND-OFF]  87.12,159.26 0 top
JP198  STAND-OFF  [STAND-OFF]  107.44,159.26 0 top
JP199  FIDUCIALUFIDUCIAL  [MICRO-FIDUCIAL]  109.09,137.29 0 top
JP200  FIDUCIALUFIDUCIAL  [MICRO-FIDUCIAL]  85.34,161.04 0 top
JP201  [SMT-JUMPER_3_2-NC_PASTE_SILK]  97.28,152.91 0 top
JP202  FIDUCIALUFIDUCIAL  [MICRO-FIDUCIAL]  109.09,137.29 0 bottom
JP203  FIDUCIALUFIDUCIAL  [MICRO-FIDUCIAL]  85.34,161.04 0 bottom
JP204  STAND-OFF  [STAND-OFF]  113.03,159.26 0 top
JP205  STAND-OFF  [STAND-OFF]  133.35,159.26 0 top
JP206  FIDUCIALUFIDUCIAL  [MICRO-FIDUCIAL]  135,137.29 0 top
JP207  FIDUCIALUFIDUCIAL  [MICRO-FIDUCIAL]  111.25,161.04 0 top
JP208  [SMT-JUMPER_3_2-NC_PASTE_SILK]  123.19,152.91 0 top
JP209  FIDUCIALUFIDUCIAL  [MICRO-FIDUCIAL]  135,137.29 0 bottom
JP210  FIDUCIALUFIDUCIAL  [MICRO-FIDUCIAL]  111.25,161.04 0 bottom
JP211  STAND-OFF  [STAND-OFF]  9.4,185.17 0 top
JP212  STAND-OFF  [STAND-OFF]  29.72,185.17 0 top
JP213  FIDUCIALUFIDUCIAL  [MICRO-FIDUCIAL]  31.37,163.19 0 top
JP214  FIDUCIALUFIDUCIAL  [MICRO-FIDUCIAL]  7.62,186.94 0 top
JP215  [SMT-JUMPER_3_2-NC_PASTE_SILK]  19.56,178.82 0 top
JP216  FIDUCIALUFIDUCIAL  [MICRO-FIDUCIAL]  31.37,163.19 0 bottom
JP217  FIDUCIALUFIDUCIAL  [MICRO-FIDUCIAL]  7.62,186.94 0 bottom
JP218  STAND-OFF  [STAND-OFF]  35.31,185.17 0 top
JP219  STAND-OFF  [STAND-OFF]  55.63,185.17 0 top
JP220  FIDUCIALUFIDUCIAL  [MICRO-FIDUCIAL]  57.28,163.19 0 top
JP221  FIDUCIALUFIDUCIAL  [MICRO-FIDUCIAL]  33.53,186.94 0 top
JP222  [SMT-JUMPER_3_2-NC_PASTE_SILK]  45.47,178.82 0 top
JP223  FIDUCIALUFIDUCIAL  [MICRO-FIDUCIAL]  57.28,163.19 0 bottom
JP224  FIDUCIALUFIDUCIAL  [MICRO-FIDUCIAL]  33.53,186.94 0 bottom
JP225  STAND-OFF  [STAND-OFF]  61.21,185.17 0 top
JP226  STAND-OFF  [STAND-OFF]  81.53,185.17 0 top
JP227  FIDUCIALUFIDUCIAL  [MICRO-FIDUCIAL]  83.19,163.19 0 top
JP228  FIDUCIALUFIDUCIAL  [MICRO-FIDUCIAL]  59.44,186.94 0 top
JP229  [SMT-JUMPER_3_2-NC_PASTE_SILK]  71.37,178.82 0 top
JP230  FIDUCIALUFIDUCIAL  [MICRO-FIDUCIAL]  83.19,163.19 0 bottom
JP231  FIDUCIALUFIDUCIAL  [MICRO-FIDUCIAL]  59.44,186.94 0 bottom
JP232  STAND-OFF  [STAND-OFF]  87.12,185.17 0 top
JP233  STAND-OFF  [STAND-OFF]  107.44,185.17 0 top
JP234  FIDUCIALUFIDUCIAL  [MICRO-FIDUCIAL]  109.09,163.19 0 top
JP235  FIDUCIALUFIDUCIAL  [MICRO-FIDUCIAL]  85.34,186.94 0 top
JP236  [SMT-JUMPER_3_2-NC_PASTE_SILK]  97.28,178.82 0 top
JP237  FIDUCIALUFIDUCIAL  [MICRO-FIDUCIAL]  109.09,163.19 0 bottom
JP238  FIDUCIALUFIDUCIAL  [MICRO-FIDUCIAL]  85.34,186.94 0 bottom
JP239  STAND-OFF  [STAND-OFF]  113.03,185.17 0 top
JP240  STAND-OFF  [STAND-OFF]  133.35,185.17 0 top
JP241  FIDUCIALUFIDUCIAL  [MICRO-FIDUCIAL]  135,163.19 0 top
JP242  FIDUCIALUFIDUCIAL  [MICRO-FIDUCIAL]  111.25,186.94 0 top
JP243  [SMT-JUMPER_3_2-NC_PASTE_SILK]  123.19,178.82 0 top
JP244  FIDUCIALUFIDUCIAL  [MICRO-FIDUCIAL]  135,163.19 0 bottom
JP245  FIDUCIALUFIDUCIAL  [MICRO-FIDUCIAL]  111.25,186.94 0 bottom
JP246  STAND-OFF  [STAND-OFF]  9.4,211.07 0 top
JP247  STAND-OFF  [STAND-OFF]  29.72,211.07 0 top
JP248  FIDUCIALUFIDUCIAL  [MICRO-FIDUCIAL]  31.37,189.1 0 top
JP249  FIDUCIALUFIDUCIAL  [MICRO-FIDUCIAL]  7.62,212.85 0 top
JP250  [SMT-JUMPER_3_2-NC_PASTE_SILK]  19.56,204.72 0 top
JP251  FIDUCIALUFIDUCIAL  [MICRO-FIDUCIAL]  31.37,189.1 0 bottom
JP252  FIDUCIALUFIDUCIAL  [MICRO-FIDUCIAL]  7.62,212.85 0 bottom
JP253  STAND-OFF  [STAND-OFF]  35.31,211.07 0 top
JP254  STAND-OFF  [STAND-OFF]  55.63,211.07 0 top
JP255  FIDUCIALUFIDUCIAL  [MICRO-FIDUCIAL]  57.28,189.1 0 top
JP256  FIDUCIALUFIDUCIAL  [MICRO-FIDUCIAL]  33.53,212.85 0 top
JP257  [SMT-JUMPER_3_2-NC_PASTE_SILK]  45.47,204.72 0 top
JP258  FIDUCIALUFIDUCIAL  [MICRO-FIDUCIAL]  57.28,189.1 0 bottom
JP259  FIDUCIALUFIDUCIAL  [MICRO-FIDUCIAL]  33.53,212.85 0 bottom
JP260  STAND-OFF  [STAND-OFF]  61.21,211.07 0 top
JP261  STAND-OFF  [STAND-OFF]  81.53,211.07 0 top
JP262  FIDUCIALUFIDUCIAL  [MICRO-FIDUCIAL]  83.19,189.1 0 top
JP263  FIDUCIALUFIDUCIAL  [MICRO-FIDUCIAL]  59.44,212.85 0 top
JP264  [SMT-JUMPER_3_2-NC_PASTE_SILK]  71.37,204.72 0 top
JP265  FIDUCIALUFIDUCIAL  [MICRO-FIDUCIAL]  83.19,189.1 0 bottom
JP266  FIDUCIALUFIDUCIAL  [MICRO-FIDUCIAL]  59.44,212.85 0 bottom
JP267  STAND-OFF  [STAND-OFF]  87.12,211.07 0 top
JP268  STAND-OFF  [STAND-OFF]  107.44,211.07 0 top
JP269  FIDUCIALUFIDUCIAL  [MICRO-FIDUCIAL]  109.09,189.1 0 top
JP270  FIDUCIALUFIDUCIAL  [MICRO-FIDUCIAL]  85.34,212.85 0 top
JP271  [SMT-JUMPER_3_2-NC_PASTE_SILK]  97.28,204.72 0 top
JP272  FIDUCIALUFIDUCIAL  [MICRO-FIDUCIAL]  109.09,189.1 0 bottom
JP273  FIDUCIALUFIDUCIAL  [MICRO-FIDUCIAL]  85.34,212.85 0 bottom
JP274  STAND-OFF  [STAND-OFF]  113.03,211.07 0 top
JP275  STAND-OFF  [STAND-OFF]  133.35,211.07 0 top
JP276  FIDUCIALUFIDUCIAL  [MICRO-FIDUCIAL]  135,189.1 0 top
JP277  FIDUCIALUFIDUCIAL  [MICRO-FIDUCIAL]  111.25,212.85 0 top
JP278  [SMT-JUMPER_3_2-NC_PASTE_SILK]  123.19,204.72 0 top
JP279  FIDUCIALUFIDUCIAL  [MICRO-FIDUCIAL]  135,189.1 0 bottom
JP280  FIDUCIALUFIDUCIAL  [MICRO-FIDUCIAL]  111.25,212.85 0 bottom
LOGO1  OSHW-LOGOMINI  [OSHW-LOGO-MINI]  9.4,10.67 0 bottom
LOGO2  SFE_LOGO_NAME_FLAME.1_INCH  [SFE_LOGO_NAME_FLAME_.1]  13.72,25.27 0 top
LOGO3  SFE_LOGO_NAME_FLAME.1_INCH  [SFE_LOGO_NAME_FLAME_.1]  25.53,25.27 0 bottom
LOGO4  OSHW-LOGOMINI  [OSHW-LOGO-MINI]  35.31,10.67 0 bottom
LOGO5  SFE_LOGO_NAME_FLAME.1_INCH  [SFE_LOGO_NAME_FLAME_.1]  39.62,25.27 0 top
LOGO6  SFE_LOGO_NAME_FLAME.1_INCH  [SFE_LOGO_NAME_FLAME_.1]  51.44,25.27 0 bottom
LOGO7  OSHW-LOGOMINI  [OSHW-LOGO-MINI]  61.21,10.67 0 bottom
LOGO8  SFE_LOGO_NAME_FLAME.1_INCH  [SFE_LOGO_NAME_FLAME_.1]  65.53,25.27 0 top
LOGO9  SFE_LOGO_NAME_FLAME.1_INCH  [SFE_LOGO_NAME_FLAME_.1]  77.34,25.27 0 bottom
LOGO10  OSHW-LOGOMINI  [OSHW-LOGO-MINI]  87.12,10.67 0 bottom
LOGO11  SFE_LOGO_NAME_FLAME.1_INCH  [SFE_LOGO_NAME_FLAME_.1]  91.44,25.27 0 top
LOGO12  SFE_LOGO_NAME_FLAME.1_INCH  [SFE_LOGO_NAME_FLAME_.1]  103.25,25.27 0 bottom
LOGO13  OSHW-LOGOMINI  [OSHW-LOGO-MINI]  113.03,10.67 0 bottom
LOGO14  SFE_LOGO_NAME_FLAME.1_INCH  [SFE_LOGO_NAME_FLAME_.1]  117.35,25.27 0 top
LOGO15  SFE_LOGO_NAME_FLAME.1_INCH  [SFE_LOGO_NAME_FLAME_.1]  129.16,25.27 0 bottom
LOGO16  OSHW-LOGOMINI  [OSHW-LOGO-MINI]  9.4,36.58 0 bottom
LOGO17  SFE_LOGO_NAME_FLAME.1_INCH  [SFE_LOGO_NAME_FLAME_.1]  13.72,51.18 0 top
LOGO18  SFE_LOGO_NAME_FLAME.1_INCH  [SFE_LOGO_NAME_FLAME_.1]  25.53,51.18 0 bottom
LOGO19  OSHW-LOGOMINI  [OSHW-LOGO-MINI]  35.31,36.58 0 bottom
LOGO20  SFE_LOGO_NAME_FLAME.1_INCH  [SFE_LOGO_NAME_FLAME_.1]  39.62,51.18 0 top
LOGO21  SFE_LOGO_NAME_FLAME.1_INCH  [SFE_LOGO_NAME_FLAME_.1]  51.44,51.18 0 bottom
LOGO22  OSHW-LOGOMINI  [OSHW-LOGO-MINI]  61.21,36.58 0 bottom
LOGO23  SFE_LOGO_NAME_FLAME.1_INCH  [SFE_LOGO_NAME_FLAME_.1]  65.53,51.18 0 top
LOGO24  SFE_LOGO_NAME_FLAME.1_INCH  [SFE_LOGO_NAME_FLAME_.1]  77.34,51.18 0 bottom
LOGO25  OSHW-LOGOMINI  [OSHW-LOGO-MINI]  87.12,36.58 0 bottom
LOGO26  SFE_LOGO_NAME_FLAME.1_INCH  [SFE_LOGO_NAME_FLAME_.1]  91.44,51.18 0 top
LOGO27  SFE_LOGO_NAME_FLAME.1_INCH  [SFE_LOGO_NAME_FLAME_.1]  103.25,51.18 0 bottom
LOGO28  OSHW-LOGOMINI  [OSHW-LOGO-MINI]  113.03,36.58 0 bottom
LOGO29  SFE_LOGO_NAME_FLAME.1_INCH  [SFE_LOGO_NAME_FLAME_.1]  117.35,51.18 0 top
LOGO30  SFE_LOGO_NAME_FLAME.1_INCH  [SFE_LOGO_NAME_FLAME_.1]  129.16,51.18 0 bottom
LOGO31  OSHW-LOGOMINI  [OSHW-LOGO-MINI]  9.4,62.48 0 bottom
LOGO32  SFE_LOGO_NAME_FLAME.1_INCH  [SFE_LOGO_NAME_FLAME_.1]  13.72,77.09 0 top
LOGO33  SFE_LOGO_NAME_FLAME.1_INCH  [SFE_LOGO_NAME_FLAME_.1]  25.53,77.09 0 bottom
LOGO34  OSHW-LOGOMINI  [OSHW-LOGO-MINI]  35.31,62.48 0 bottom
LOGO35  SFE_LOGO_NAME_FLAME.1_INCH  [SFE_LOGO_NAME_FLAME_.1]  39.62,77.09 0 top
LOGO36  SFE_LOGO_NAME_FLAME.1_INCH  [SFE_LOGO_NAME_FLAME_.1]  51.44,77.09 0 bottom
LOGO37  OSHW-LOGOMINI  [OSHW-LOGO-MINI]  61.21,62.48 0 bottom
LOGO38  SFE_LOGO_NAME_FLAME.1_INCH  [SFE_LOGO_NAME_FLAME_.1]  65.53,77.09 0 top
LOGO39  SFE_LOGO_NAME_FLAME.1_INCH  [SFE_LOGO_NAME_FLAME_.1]  77.34,77.09 0 bottom
LOGO40  OSHW-LOGOMINI  [OSHW-LOGO-MINI]  87.12,62.48 0 bottom
LOGO41  SFE_LOGO_NAME_FLAME.1_INCH  [SFE_LOGO_NAME_FLAME_.1]  91.44,77.09 0 top
LOGO42  SFE_LOGO_NAME_FLAME.1_INCH  [SFE_LOGO_NAME_FLAME_.1]  103.25,77.09 0 bottom
LOGO43  OSHW-LOGOMINI  [OSHW-LOGO-MINI]  113.03,62.48 0 bottom
LOGO44  SFE_LOGO_NAME_FLAME.1_INCH  [SFE_LOGO_NAME_FLAME_.1]  117.35,77.09 0 top
LOGO45  SFE_LOGO_NAME_FLAME.1_INCH  [SFE_LOGO_NAME_FLAME_.1]  129.16,77.09 0 bottom
LOGO46  OSHW-LOGOMINI  [OSHW-LOGO-MINI]  9.4,88.39 0 bottom
LOGO47  SFE_LOGO_NAME_FLAME.1_INCH  [SFE_LOGO_NAME_FLAME_.1]  13.72,103 0 top
LOGO48  SFE_LOGO_NAME_FLAME.1_INCH  [SFE_LOGO_NAME_FLAME_.1]  25.53,103 0 bottom
LOGO49  OSHW-LOGOMINI  [OSHW-LOGO-MINI]  35.31,88.39 0 bottom
LOGO50  SFE_LOGO_NAME_FLAME.1_INCH  [SFE_LOGO_NAME_FLAME_.1]  39.62,103 0 top
LOGO51  SFE_LOGO_NAME_FLAME.1_INCH  [SFE_LOGO_NAME_FLAME_.1]  51.44,103 0 bottom
LOGO52  OSHW-LOGOMINI  [OSHW-LOGO-MINI]  61.21,88.39 0 bottom
LOGO53  SFE_LOGO_NAME_FLAME.1_INCH  [SFE_LOGO_NAME_FLAME_.1]  65.53,103 0 top
LOGO54  SFE_LOGO_NAME_FLAME.1_INCH  [SFE_LOGO_NAME_FLAME_.1]  77.34,103 0 bottom
LOGO55  OSHW-LOGOMINI  [OSHW-LOGO-MINI]  87.12,88.39 0 bottom
LOGO56  SFE_LOGO_NAME_FLAME.1_INCH  [SFE_LOGO_NAME_FLAME_.1]  91.44,103 0 top
LOGO57  SFE_LOGO_NAME_FLAME.1_INCH  [SFE_LOGO_NAME_FLAME_.1]  103.25,103 0 bottom
LOGO58  OSHW-LOGOMINI  [OSHW-LOGO-MINI]  113.03,88.39 0 bottom
LOGO59  SFE_LOGO_NAME_FLAME.1_INCH  [SFE_LOGO_NAME_FLAME_.1]  117.35,103 0 top
LOGO60  SFE_LOGO_NAME_FLAME.1_INCH  [SFE_LOGO_NAME_FLAME_.1]  129.16,103 0 bottom
LOGO61  OSHW-LOGOMINI  [OSHW-LOGO-MINI]  9.4,114.3 0 bottom
LOGO62  SFE_LOGO_NAME_FLAME.1_INCH  [SFE_LOGO_NAME_FLAME_.1]  13.72,128.91 0 top
LOGO63  SFE_LOGO_NAME_FLAME.1_INCH  [SFE_LOGO_NAME_FLAME_.1]  25.53,128.91 0 bottom
LOGO64  OSHW-LOGOMINI  [OSHW-LOGO-MINI]  35.31,114.3 0 bottom
LOGO65  SFE_LOGO_NAME_FLAME.1_INCH  [SFE_LOGO_NAME_FLAME_.1]  39.62,128.91 0 top
LOGO66  SFE_LOGO_NAME_FLAME.1_INCH  [SFE_LOGO_NAME_FLAME_.1]  51.44,128.91 0 bottom
LOGO67  OSHW-LOGOMINI  [OSHW-LOGO-MINI]  61.21,114.3 0 bottom
LOGO68  SFE_LOGO_NAME_FLAME.1_INCH  [SFE_LOGO_NAME_FLAME_.1]  65.53,128.91 0 top
LOGO69  SFE_LOGO_NAME_FLAME.1_INCH  [SFE_LOGO_NAME_FLAME_.1]  77.34,128.91 0 bottom
LOGO70  OSHW-LOGOMINI  [OSHW-LOGO-MINI]  87.12,114.3 0 bottom
LOGO71  SFE_LOGO_NAME_FLAME.1_INCH  [SFE_LOGO_NAME_FLAME_.1]  91.44,128.91 0 top
LOGO72  SFE_LOGO_NAME_FLAME.1_INCH  [SFE_LOGO_NAME_FLAME_.1]  103.25,128.91 0 bottom
LOGO73  OSHW-LOGOMINI  [OSHW-LOGO-MINI]  113.03,114.3 0 bottom
LOGO74  SFE_LOGO_NAME_FLAME.1_INCH  [SFE_LOGO_NAME_FLAME_.1]  117.35,128.91 0 top
LOGO75  SFE_LOGO_NAME_FLAME.1_INCH  [SFE_LOGO_NAME_FLAME_.1]  129.16,128.91 0 bottom
LOGO76  OSHW-LOGOMINI  [OSHW-LOGO-MINI]  9.4,140.21 0 bottom
LOGO77  SFE_LOGO_NAME_FLAME.1_INCH  [SFE_LOGO_NAME_FLAME_.1]  13.72,154.81 0 top
LOGO78  SFE_LOGO_NAME_FLAME.1_INCH  [SFE_LOGO_NAME_FLAME_.1]  25.53,154.81 0 bottom
LOGO79  OSHW-LOGOMINI  [OSHW-LOGO-MINI]  35.31,140.21 0 bottom
LOGO80  SFE_LOGO_NAME_FLAME.1_INCH  [SFE_LOGO_NAME_FLAME_.1]  39.62,154.81 0 top
LOGO81  SFE_LOGO_NAME_FLAME.1_INCH  [SFE_LOGO_NAME_FLAME_.1]  51.44,154.81 0 bottom
LOGO82  OSHW-LOGOMINI  [OSHW-LOGO-MINI]  61.21,140.21 0 bottom
LOGO83  SFE_LOGO_NAME_FLAME.1_INCH  [SFE_LOGO_NAME_FLAME_.1]  65.53,154.81 0 top
LOGO84  SFE_LOGO_NAME_FLAME.1_INCH  [SFE_LOGO_NAME_FLAME_.1]  77.34,154.81 0 bottom
LOGO85  OSHW-LOGOMINI  [OSHW-LOGO-MINI]  87.12,140.21 0 bottom
LOGO86  SFE_LOGO_NAME_FLAME.1_INCH  [SFE_LOGO_NAME_FLAME_.1]  91.44,154.81 0 top
LOGO87  SFE_LOGO_NAME_FLAME.1_INCH  [SFE_LOGO_NAME_FLAME_.1]  103.25,154.81 0 bottom
LOGO88  OSHW-LOGOMINI  [OSHW-LOGO-MINI]  113.03,140.21 0 bottom
LOGO89  SFE_LOGO_NAME_FLAME.1_INCH  [SFE_LOGO_NAME_FLAME_.1]  117.35,154.81 0 top
LOGO90  SFE_LOGO_NAME_FLAME.1_INCH  [SFE_LOGO_NAME_FLAME_.1]  129.16,154.81 0 bottom
LOGO91  OSHW-LOGOMINI  [OSHW-LOGO-MINI]  9.4,166.12 0 bottom
LOGO92  SFE_LOGO_NAME_FLAME.1_INCH  [SFE_LOGO_NAME_FLAME_.1]  13.72,180.72 0 top
LOGO93  SFE_LOGO_NAME_FLAME.1_INCH  [SFE_LOGO_NAME_FLAME_.1]  25.53,180.72 0 bottom
LOGO94  OSHW-LOGOMINI  [OSHW-LOGO-MINI]  35.31,166.12 0 bottom
LOGO95  SFE_LOGO_NAME_FLAME.1_INCH  [SFE_LOGO_NAME_FLAME_.1]  39.62,180.72 0 top
LOGO96  SFE_LOGO_NAME_FLAME.1_INCH  [SFE_LOGO_NAME_FLAME_.1]  51.44,180.72 0 bottom
LOGO97  OSHW-LOGOMINI  [OSHW-LOGO-MINI]  61.21,166.12 0 bottom
LOGO98  SFE_LOGO_NAME_FLAME.1_INCH  [SFE_LOGO_NAME_FLAME_.1]  65.53,180.72 0 top
LOGO99  SFE_LOGO_NAME_FLAME.1_INCH  [SFE_LOGO_NAME_FLAME_.1]  77.34,180.72 0 bottom
LOGO100  OSHW-LOGOMINI  [OSHW-LOGO-MINI]  87.12,166.12 0 bottom
LOGO101  SFE_LOGO_NAME_FLAME.1_INCH  [SFE_LOGO_NAME_FLAME_.1]  91.44,180.72 0 top
LOGO102  SFE_LOGO_NAME_FLAME.1_INCH  [SFE_LOGO_NAME_FLAME_.1]  103.25,180.72 0 bottom
LOGO103  OSHW-LOGOMINI  [OSHW-LOGO-MINI]  113.03,166.12 0 bottom
LOGO104  SFE_LOGO_NAME_FLAME.1_INCH  [SFE_LOGO_NAME_FLAME_.1]  117.35,180.72 0 top
LOGO105  SFE_LOGO_NAME_FLAME.1_INCH  [SFE_LOGO_NAME_FLAME_.1]  129.16,180.72 0 bottom
LOGO106  OSHW-LOGOMINI  [OSHW-LOGO-MINI]  9.4,192.02 0 bottom
LOGO107  SFE_LOGO_NAME_FLAME.1_INCH  [SFE_LOGO_NAME_FLAME_.1]  13.72,206.63 0 top
LOGO108  SFE_LOGO_NAME_FLAME.1_INCH  [SFE_LOGO_NAME_FLAME_.1]  25.53,206.63 0 bottom
LOGO109  OSHW-LOGOMINI  [OSHW-LOGO-MINI]  35.31,192.02 0 bottom
LOGO110  SFE_LOGO_NAME_FLAME.1_INCH  [SFE_LOGO_NAME_FLAME_.1]  39.62,206.63 0 top
LOGO111  SFE_LOGO_NAME_FLAME.1_INCH  [SFE_LOGO_NAME_FLAME_.1]  51.44,206.63 0 bottom
LOGO112  OSHW-LOGOMINI  [OSHW-LOGO-MINI]  61.21,192.02 0 bottom
LOGO113  SFE_LOGO_NAME_FLAME.1_INCH  [SFE_LOGO_NAME_FLAME_.1]  65.53,206.63 0 top
LOGO114  SFE_LOGO_NAME_FLAME.1_INCH  [SFE_LOGO_NAME_FLAME_.1]  77.34,206.63 0 bottom
LOGO115  OSHW-LOGOMINI  [OSHW-LOGO-MINI]  87.12,192.02 0 bottom
LOGO116  SFE_LOGO_NAME_FLAME.1_INCH  [SFE_LOGO_NAME_FLAME_.1]  91.44,206.63 0 top
LOGO117  SFE_LOGO_NAME_FLAME.1_INCH  [SFE_LOGO_NAME_FLAME_.1]  103.25,206.63 0 bottom
LOGO118  OSHW-LOGOMINI  [OSHW-LOGO-MINI]  113.03,192.02 0 bottom
LOGO119  SFE_LOGO_NAME_FLAME.1_INCH  [SFE_LOGO_NAME_FLAME_.1]  117.35,206.63 0 top
LOGO120  SFE_LOGO_NAME_FLAME.1_INCH  [SFE_LOGO_NAME_FLAME_.1]  129.16,206.63 0 bottom
R1  4.7k  [0603]  49.28,23.37 90 top
R2  10k  [0603]  19.56,15.75 0 top
R3  4.7k  [0603]  41.66,23.37 90 top
R4  4.7k  [0603]  23.37,23.37 90 top
R5  4.7k  [0603]  15.75,23.37 90 top
R6  10k  [0603]  45.47,15.75 0 top
R7  4.7k  [0603]  75.18,23.37 90 top
R8  4.7k  [0603]  67.56,23.37 90 top
R9  10k  [0603]  71.37,15.75 0 top
R10  4.7k  [0603]  101.09,23.37 90 top
R11  4.7k  [0603]  93.47,23.37 90 top
R12  10k  [0603]  97.28,15.75 0 top
R13  4.7k  [0603]  127,23.37 90 top
R14  4.7k  [0603]  119.38,23.37 90 top
R15  10k  [0603]  123.19,15.75 0 top
R16  4.7k  [0603]  23.37,49.28 90 top
R17  4.7k  [0603]  15.75,49.28 90 top
R18  10k  [0603]  19.56,41.66 0 top
R19  4.7k  [0603]  49.28,49.28 90 top
R20  4.7k  [0603]  41.66,49.28 90 top
R21  10k  [0603]  45.47,41.66 0 top
R22  4.7k  [0603]  75.18,49.28 90 top
R23  4.7k  [0603]  67.56,49.28 90 top
R24  10k  [0603]  71.37,41.66 0 top
R25  4.7k  [0603]  101.09,49.28 90 top
R26  4.7k  [0603]  93.47,49.28 90 top
R27  10k  [0603]  97.28,41.66 0 top
R28  4.7k  [0603]  127,49.28 90 top
R29  4.7k  [0603]  119.38,49.28 90 top
R30  10k  [0603]  123.19,41.66 0 top
R31  4.7k  [0603]  23.37,75.18 90 top
R32  4.7k  [0603]  15.75,75.18 90 top
R33  10k  [0603]  19.56,67.56 0 top
R34  4.7k  [0603]  49.28,75.18 90 top
R35  4.7k  [0603]  41.66,75.18 90 top
R36  10k  [0603]  45.47,67.56 0 top
R37  4.7k  [0603]  75.18,75.18 90 top
R38  4.7k  [0603]  67.56,75.18 90 top
R39  10k  [0603]  71.37,67.56 0 top
R40  4.7k  [0603]  101.09,75.18 90 top
R41  4.7k  [0603]  93.47,75.18 90 top
R42  10k  [0603]  97.28,67.56 0 top
R43  4.7k  [0603]  127,75.18 90 top
R44  4.7k  [0603]  119.38,75.18 90 top
R45  10k  [0603]  123.19,67.56 0 top
R46  4.7k  [0603]  23.37,101.09 90 top
R47  4.7k  [0603]  15.75,101.09 90 top
R48  10k  [0603]  19.56,93.47 0 top
R49  4.7k  [0603]  49.28,101.09 90 top
R50  4.7k  [0603]  41.66,101.09 90 top
R51  10k  [0603]  45.47,93.47 0 top
R52  4.7k  [0603]  75.18,101.09 90 top
R53  4.7k  [0603]  67.56,101.09 90 top
R54  10k  [0603]  71.37,93.47 0 top
R55  4.7k  [0603]  101.09,101.09 90 top
R56  4.7k  [0603]  93.47,101.09 90 top
R57  10k  [0603]  97.28,93.47 0 top
R58  4.7k  [0603]  127,101.09 90 top
R59  4.7k  [0603]  119.38,101.09 90 top
R60  10k  [0603]  123.19,93.47 0 top
R61  4.7k  [0603]  23.37,127 90 top
R62  4.7k  [0603]  15.75,127 90 top
R63  10k  [0603]  19.56,119.38 0 top
R64  4.7k  [0603]  49.28,127 90 top
R65  4.7k  [0603]  41.66,127 90 top
R66  10k  [0603]  45.47,119.38 0 top
R67  4.7k  [0603]  75.18,127 90 top
R68  4.7k  [0603]  67.56,127 90 top
R69  10k  [0603]  71.37,119.38 0 top
R70  4.7k  [0603]  101.09,127 90 top
R71  4.7k  [0603]  93.47,127 90 top
R72  10k  [0603]  97.28,119.38 0 top
R73  4.7k  [0603]  127,127 90 top
R74  4.7k  [0603]  119.38,127 90 top
R75  10k  [0603]  123.19,119.38 0 top
R76  4.7k  [0603]  23.37,152.91 90 top
R77  4.7k  [0603]  15.75,152.91 90 top
R78  10k  [0603]  19.56,145.29 0 top
R79  4.7k  [0603]  49.28,152.91 90 top
R80  4.7k  [0603]  41.66,152.91 90 top
R81  10k  [0603]  45.47,145.29 0 top
R82  4.7k  [0603]  75.18,152.91 90 top
R83  4.7k  [0603]  67.56,152.91 90 top
R84  10k  [0603]  71.37,145.29 0 top
R85  4.7k  [0603]  101.09,152.91 90 top
R86  4.7k  [0603]  93.47,152.91 90 top
R87  10k  [0603]  97.28,145.29 0 top
R88  4.7k  [0603]  127,152.91 90 top
R89  4.7k  [0603]  119.38,152.91 90 top
R90  10k  [0603]  123.19,145.29 0 top
R91  4.7k  [0603]  23.37,178.82 90 top
R92  4.7k  [0603]  15.75,178.82 90 top
R93  10k  [0603]  19.56,171.2 0 top
R94  4.7k  [0603]  49.28,178.82 90 top
R95  4.7k  [0603]  41.66,178.82 90 top
R96  10k  [0603]  45.47,171.2 0 top
R97  4.7k  [0603]  75.18,178.82 90 top
R98  4.7k  [0603]  67.56,178.82 90 top
R99  10k  [0603]  71.37,171.2 0 top
R100  4.7k  [0603]  101.09,178.82 90 top
R101  4.7k  [0603]  93.47,178.82 90 top
R102  10k  [0603]  97.28,171.2 0 top
R103  4.7k  [0603]  127,178.82 90 top
R104  4.7k  [0603]  119.38,178.82 90 top
R105  10k  [0603]  123.19,171.2 0 top
R106  4.7k  [0603]  23.37,204.72 90 top
R107  4.7k  [0603]  15.75,204.72 90 top
R108  10k  [0603]  19.56,197.1 0 top
R109  4.7k  [0603]  49.28,204.72 90 top
R110  4.7k  [0603]  41.66,204.72 90 top
R111  10k  [0603]  45.47,197.1 0 top
R112  4.7k  [0603]  75.18,204.72 90 top
R113  4.7k  [0603]  67.56,204.72 90 top
R114  10k  [0603]  71.37,197.1 0 top
R115  4.7k  [0603]  101.09,204.72 90 top
R116  4.7k  [0603]  93.47,204.72 90 top
R117  10k  [0603]  97.28,197.1 0 top
R118  4.7k  [0603]  127,204.72 90 top
R119  4.7k  [0603]  119.38,204.72 90 top
R120  10k  [0603]  123.19,197.1 0 top
SJ1  [SJ_2S-NO]  19.56,13.84 0 bottom
SJ2  [SJ_2S-NO]  45.47,13.84 0 bottom
SJ3  [SJ_2S-NO]  71.37,13.84 0 bottom
SJ4  [SJ_2S-NO]  97.28,13.84 0 bottom
SJ5  [SJ_2S-NO]  123.19,13.84 0 bottom
SJ6  [SJ_2S-NO]  19.56,39.75 0 bottom
SJ7  [SJ_2S-NO]  45.47,39.75 0 bottom
SJ8  [SJ_2S-NO]  71.37,39.75 0 bottom
SJ9  [SJ_2S-NO]  97.28,39.75 0 bottom
SJ10  [SJ_2S-NO]  123.19,39.75 0 bottom
SJ11  [SJ_2S-NO]  19.56,65.66 0 bottom
SJ12  [SJ_2S-NO]  45.47,65.66 0 bottom
SJ13  [SJ_2S-NO]  71.37,65.66 0 bottom
SJ14  [SJ_2S-NO]  97.28,65.66 0 bottom
SJ15  [SJ_2S-NO]  123.19,65.66 0 bottom
SJ16  [SJ_2S-NO]  19.56,91.57 0 bottom
SJ17  [SJ_2S-NO]  45.47,91.57 0 bottom
SJ18  [SJ_2S-NO]  71.37,91.57 0 bottom
SJ19  [SJ_2S-NO]  97.28,91.57 0 bottom
SJ20  [SJ_2S-NO]  123.19,91.57 0 bottom
SJ21  [SJ_2S-NO]  19.56,117.47 0 bottom
SJ22  [SJ_2S-NO]  45.47,117.47 0 bottom
SJ23  [SJ_2S-NO]  71.37,117.47 0 bottom
SJ24  [SJ_2S-NO]  97.28,117.47 0 bottom
SJ25  [SJ_2S-NO]  123.19,117.47 0 bottom
SJ26  [SJ_2S-NO]  19.56,143.38 0 bottom
SJ27  [SJ_2S-NO]  45.47,143.38 0 bottom
SJ28  [SJ_2S-NO]  71.37,143.38 0 bottom
SJ29  [SJ_2S-NO]  97.28,143.38 0 bottom
SJ30  [SJ_2S-NO]  123.19,143.38 0 bottom
SJ31  [SJ_2S-NO]  19.56,169.29 0 bottom
SJ32  [SJ_2S-NO]  45.47,169.29 0 bottom
SJ33  [SJ_2S-NO]  71.37,169.29 0 bottom
SJ34  [SJ_2S-NO]  97.28,169.29 0 bottom
SJ35  [SJ_2S-NO]  123.19,169.29 0 bottom
SJ36  [SJ_2S-NO]  19.56,195.2 0 bottom
SJ37  [SJ_2S-NO]  45.47,195.2 0 bottom
SJ38  [SJ_2S-NO]  71.37,195.2 0 bottom
SJ39  [SJ_2S-NO]  97.28,195.2 0 bottom
SJ40  [SJ_2S-NO]  123.19,195.2 0 bottom
U1  MMA8452Q  [QFN-16]  45.47,19.56 0 top
U2  MMA8452Q  [QFN-16]  19.56,19.56 0 top
U3  MMA8452Q  [QFN-16]  71.37,19.56 0 top
U4  MMA8452Q  [QFN-16]  97.28,19.56 0 top
U5  MMA8452Q  [QFN-16]  123.19,19.56 0 top
U6  MMA8452Q  [QFN-16]  19.56,45.47 0 top
U7  MMA8452Q  [QFN-16]  45.47,45.47 0 top
U8  MMA8452Q  [QFN-16]  71.37,45.47 0 top
U9  MMA8452Q  [QFN-16]  97.28,45.47 0 top
U10  MMA8452Q  [QFN-16]  123.19,45.47 0 top
U11  MMA8452Q  [QFN-16]  19.56,71.37 0 top
U12  MMA8452Q  [QFN-16]  45.47,71.37 0 top
U13  MMA8452Q  [QFN-16]  71.37,71.37 0 top
U14  MMA8452Q  [QFN-16]  97.28,71.37 0 top
U15  MMA8452Q  [QFN-16]  123.19,71.37 0 top
U16  MMA8452Q  [QFN-16]  19.56,97.28 0 top
U17  MMA8452Q  [QFN-16]  45.47,97.28 0 top
U18  MMA8452Q  [QFN-16]  71.37,97.28 0 top
U19  MMA8452Q  [QFN-16]  97.28,97.28 0 top
U20  MMA8452Q  [QFN-16]  123.19,97.28 0 top
U21  MMA8452Q  [QFN-16]  19.56,123.19 0 top
U22  MMA8452Q  [QFN-16]  45.47,123.19 0 top
U23  MMA8452Q  [QFN-16]  71.37,123.19 0 top
U24  MMA8452Q  [QFN-16]  97.28,123.19 0 top
U25  MMA8452Q  [QFN-16]  123.19,123.19 0 top
U26  MMA8452Q  [QFN-16]  19.56,149.1 0 top
U27  MMA8452Q  [QFN-16]  45.47,149.1 0 top
U28  MMA8452Q  [QFN-16]  71.37,149.1 0 top
U29  MMA8452Q  [QFN-16]  97.28,149.1 0 top
U30  MMA8452Q  [QFN-16]  123.19,149.1 0 top
U31  MMA8452Q  [QFN-16]  19.56,175.01 0 top
U32  MMA8452Q  [QFN-16]  45.47,175.01 0 top
U33  MMA8452Q  [QFN-16]  71.37,175.01 0 top
U34  MMA8452Q  [QFN-16]  97.28,175.01 0 top
U35  MMA8452Q  [QFN-16]  123.19,175.01 0 top
U36  MMA8452Q  [QFN-16]  19.56,200.91 0 top
U37  MMA8452Q  [QFN-16]  45.47,200.91 0 top
U38  MMA8452Q  [QFN-16]  71.37,200.91 0 top
U39  MMA8452Q  [QFN-16]  97.28,200.91 0 top
U40  MMA8452Q  [QFN-16]  123.19,200.91 0 top

## Library data of the parts
C1 C2 C4 C6 C7 C9 C10 C12 C13 C15 C16 C18 C19 C21 C22 C24 C25 C27 C28 C30 C31 C33 C34 C36 C37 C39 C40 C42 C43 C45 C46 C48 C49 C51 C52 C54 C55 C57 C58 C60 C61 C63 C64 C66 C67 C69 C70 C72 C73 C75 C76 C78 C79 C81 C82 C84 C85 C87 C88 C90 C91 C93 C94 C96 C97 C99 C100 C102 C103 C105 C106 C108 C109 C111 C112 C114 C115 C117 C118 C120 = SparkFun-Capacitors; PROD_ID: CAP-00810
C3 C5 C8 C11 C14 C17 C20 C23 C26 C29 C32 C35 C38 C41 C44 C47 C50 C53 C56 C59 C62 C65 C68 C71 C74 C77 C80 C83 C86 C89 C92 C95 C98 C101 C104 C107 C110 C113 C116 C119 = SparkFun-Capacitors; PROD_ID: CAP-08280
E$1 = SparkFun-Retired
E$7 E$8 LOGO1-LOGO120 = SparkFun-Aesthetics
J1 J6 J10 J14 J18 J22 J26 J30 J34 J38 J42 J46 J50 J54 J58 J62 J66 J70 J74 J78 J82 J86 J90 J94 J98 J102 J106 J110 J114 J118 J122 J126 J130 J134 J138 J142 J146 J150 J154 J158 = SparkFun-Connectors
J2-J4 J7 J9 J11 J13 J15 J17 J19 J21 J23 J25 J27 J29 J31 J33 J35 J37 J39 J41 J43 J45 J47 J49 J51 J53 J55 J57 J59 J61 J63 J65 J67 J69 J71 J73 J75 J77 J79 J81 J83 J85 J87 J89 J91 J93 J95 J97 J99 J101 J103 J105 J107 J109 J111 J113 J115 J117 J119 J121 J123 J125 J127 J129 J131 J133 J135 J137 J139 J141 J143 J145 J147 J149 J151 J153 J155 J157 J159 = SparkFun-Connectors; PROD_ID: CONN-13694
J5 J8 J12 J16 J20 J24 J28 J32 J36 J40 J44 J48 J52 J56 J60 J64 J68 J72 J76 J80 J84 J88 J92 J96 J100 J104 J108 J112 J116 J120 J124 J128 J132 J136 J140 J144 J148 J152 J156 J160 = SparkFun-Connectors; PROD_ID: CONN-09696
JP1-JP6 JP8-JP11 JP13-JP18 JP20-JP25 JP27-JP32 JP34-JP39 JP41-JP46 JP48-JP53 JP55-JP60 JP62-JP67 JP69-JP74 JP76-JP81 JP83-JP88 JP90-JP95 JP97-JP102 JP104-JP109 JP111-JP116 JP118-JP123 JP125-JP130 JP132-JP137 JP139-JP144 JP146-JP151 JP153-JP158 JP160-JP165 JP167-JP172 JP174-JP179 JP181-JP186 JP188-JP193 JP195-JP200 JP202-JP207 JP209-JP214 JP216-JP221 JP223-JP228 JP230-JP235 JP237-JP242 JP244-JP249 JP251-JP256 JP258-JP263 JP265-JP270 JP272-JP277 JP279 JP280 SJ1-SJ40 = SparkFun
JP7 JP12 JP19 JP26 JP33 JP40 JP47 JP54 JP61 JP68 JP75 JP82 JP89 JP96 JP103 JP110 JP117 JP124 JP131 JP138 JP145 JP152 JP159 JP166 JP173 JP180 JP187 JP194 JP201 JP208 JP215 JP222 JP229 JP236 JP243 JP250 JP257 JP264 JP271 JP278 = SparkFun-Jumpers
R1 R3-R5 R7 R8 R10 R11 R13 R14 R16 R17 R19 R20 R22 R23 R25 R26 R28 R29 R31 R32 R34 R35 R37 R38 R40 R41 R43 R44 R46 R47 R49 R50 R52 R53 R55 R56 R58 R59 R61 R62 R64 R65 R67 R68 R70 R71 R73 R74 R76 R77 R79 R80 R82 R83 R85 R86 R88 R89 R91 R92 R94 R95 R97 R98 R100 R101 R103 R104 R106 R107 R109 R110 R112 R113 R115 R116 R118 R119 = SparkFun-Resistors; PROD_ID: RES-07857
R2 R6 R9 R12 R15 R18 R21 R24 R27 R30 R33 R36 R39 R42 R45 R48 R51 R54 R57 R60 R63 R66 R69 R72 R75 R78 R81 R84 R87 R90 R93 R96 R99 R102 R105 R108 R111 R114 R117 R120 = SparkFun-Resistors; PROD_ID: RES-00824
U1-U40 = SparkFun-Sensors; PROD_ID: IC-10769